# Altium PCB 100869.pcbdoc (part 3 of 3)
Units mm, origin at the board's own origin, x right, y up, seen from the top; angles counter-clockwise.
Board outline 64 x 68 mm, 4 copper layers (Top Layer, Ground, Power, Bottom Layer), stack 1.551 mm thick; 165 components, 69 nets, 488 pads, 282 vias.
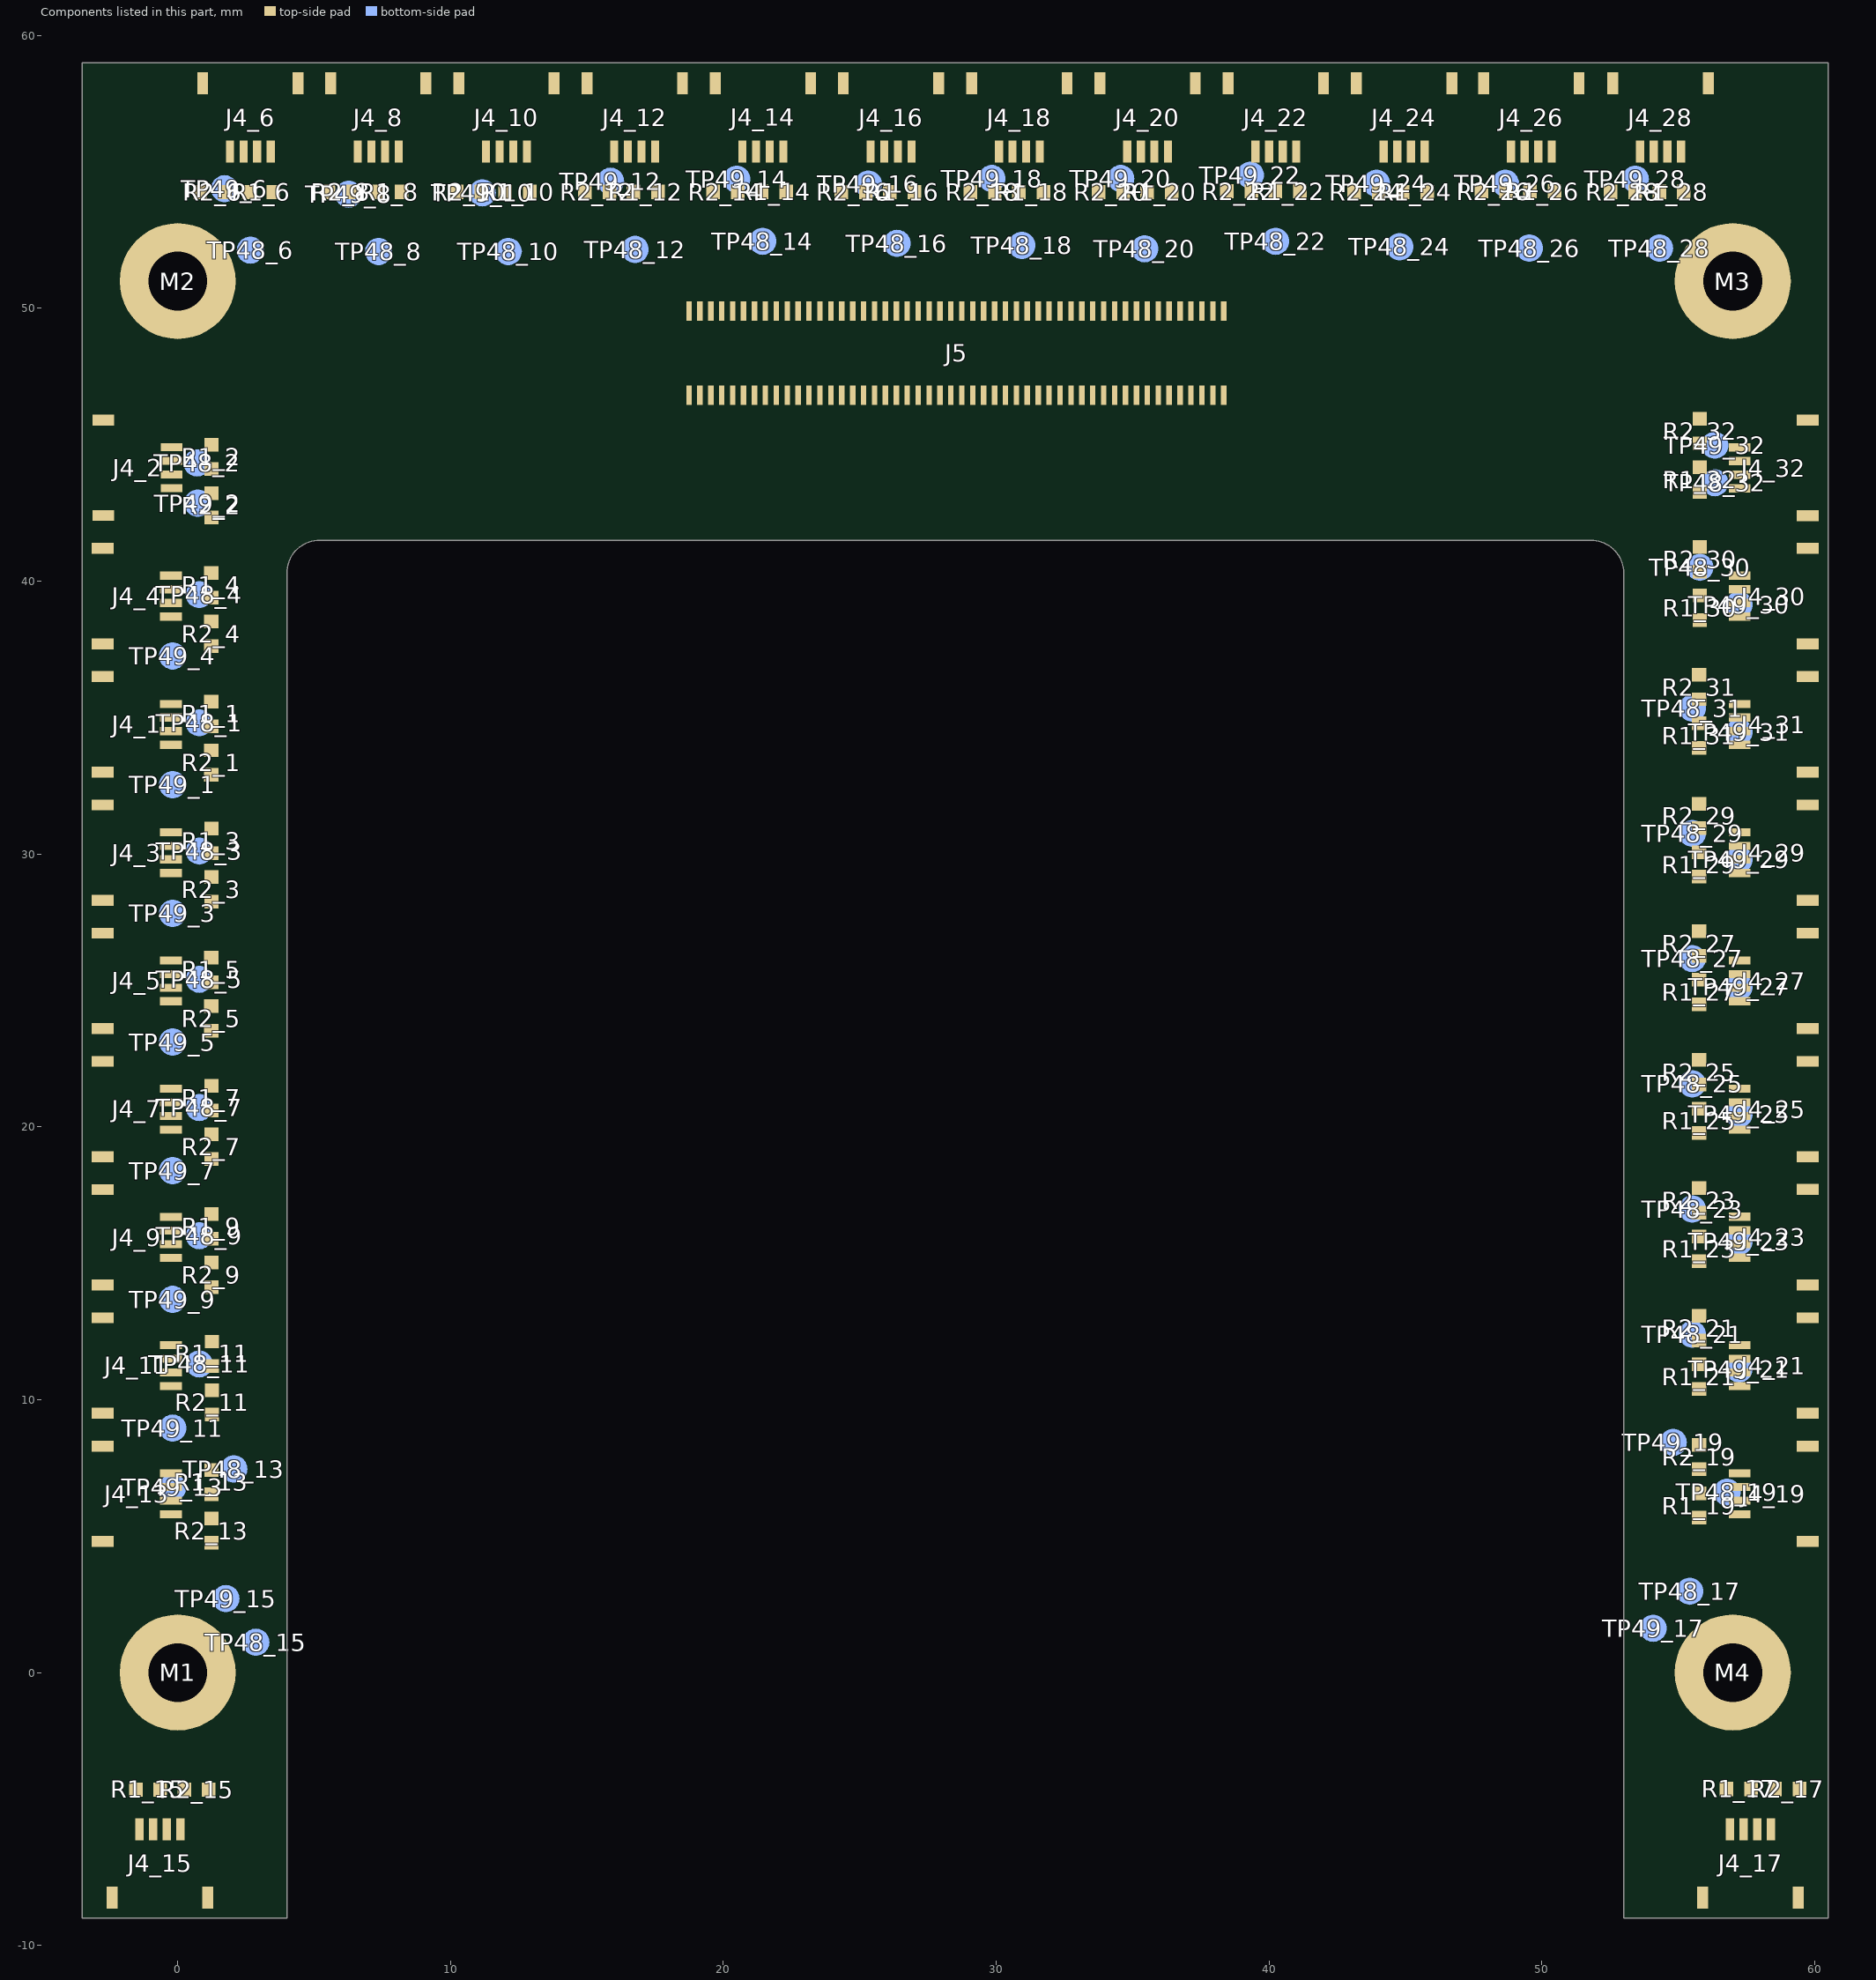
[diagram p5: the components of this part, seen from the top]

## Polygon pours and split planes (outlines as drawn)
no net on FAB_DWG (solid): -233.325,25.879 ccw(c-233.825,25.879) -233.825,26.379 ccw(c-233.825,25.879) -234.325,25.879 ccw(c-233.825,25.879) -233.825,25.379 ccw(c-233.825,25.879) -233.325,25.879
no net on FAB_DWG (solid): -235.325,25.879 ccw(c-235.825,25.879) -235.825,26.379 ccw(c-235.825,25.879) -236.325,25.879 ccw(c-235.825,25.879) -235.825,25.379 ccw(c-235.825,25.879) -235.325,25.879
no net on FAB_DWG (solid): -233.325,-24.121 ccw(c-233.825,-24.121) -233.825,-23.621 ccw(c-233.825,-24.121) -234.325,-24.121 ccw(c-233.825,-24.121) -233.825,-24.62 ccw(c-233.825,-24.121) -233.325,-24.121
no net on FAB_DWG (solid): -235.325,-24.121 ccw(c-235.825,-24.121) -235.825,-23.621 ccw(c-235.825,-24.121) -236.325,-24.121 ccw(c-235.825,-24.121) -235.825,-24.62 ccw(c-235.825,-24.121) -235.325,-24.121
no net on FAB_DWG (solid): -239.325,25.879 ccw(c-239.825,25.879) -239.825,26.379 ccw(c-239.825,25.879) -240.325,25.879 ccw(c-239.825,25.879) -239.825,25.379 ccw(c-239.825,25.879) -239.325,25.879
no net on FAB_DWG (solid): -241.325,25.879 ccw(c-241.825,25.879) -241.825,26.379 ccw(c-241.825,25.879) -242.325,25.879 ccw(c-241.825,25.879) -241.825,25.379 ccw(c-241.825,25.879) -241.325,25.879
no net on FAB_DWG (solid): -243.325,25.879 ccw(c-243.825,25.879) -243.825,26.379 ccw(c-243.825,25.879) -244.325,25.879 ccw(c-243.825,25.879) -243.825,25.379 ccw(c-243.825,25.879) -243.325,25.879
no net on FAB_DWG (solid): -237.325,25.879 ccw(c-237.825,25.879) -237.825,26.379 ccw(c-237.825,25.879) -238.325,25.879 ccw(c-237.825,25.879) -237.825,25.379 ccw(c-237.825,25.879) -237.325,25.879
no net on FAB_DWG (solid): -239.325,-24.121 ccw(c-239.825,-24.121) -239.825,-23.621 ccw(c-239.825,-24.121) -240.325,-24.121 ccw(c-239.825,-24.121) -239.825,-24.62 ccw(c-239.825,-24.121) -239.325,-24.121
no net on FAB_DWG (solid): -241.325,-24.121 ccw(c-241.825,-24.121) -241.825,-23.621 ccw(c-241.825,-24.121) -242.325,-24.121 ccw(c-241.825,-24.121) -241.825,-24.62 ccw(c-241.825,-24.121) -241.325,-24.121
no net on FAB_DWG (solid): -243.325,-24.121 ccw(c-243.825,-24.121) -243.825,-23.621 ccw(c-243.825,-24.121) -244.325,-24.121 ccw(c-243.825,-24.121) -243.825,-24.62 ccw(c-243.825,-24.121) -243.325,-24.121
no net on FAB_DWG (solid): -237.325,-24.121 ccw(c-237.825,-24.121) -237.825,-23.621 ccw(c-237.825,-24.121) -238.325,-24.121 ccw(c-237.825,-24.121) -237.825,-24.62 ccw(c-237.825,-24.121) -237.325,-24.121
no net on FAB_DWG (solid): -247.325,25.879 ccw(c-247.825,25.879) -247.825,26.379 ccw(c-247.825,25.879) -248.325,25.879 ccw(c-247.825,25.879) -247.825,25.379 ccw(c-247.825,25.879) -247.325,25.879
no net on FAB_DWG (solid): -251.325,25.879 ccw(c-251.825,25.879) -251.825,26.379 ccw(c-251.825,25.879) -252.325,25.879 ccw(c-251.825,25.879) -251.825,25.379 ccw(c-251.825,25.879) -251.325,25.879
no net on FAB_DWG (solid): -249.325,25.879 ccw(c-249.825,25.879) -249.825,26.379 ccw(c-249.825,25.879) -250.325,25.879 ccw(c-249.825,25.879) -249.825,25.379 ccw(c-249.825,25.879) -249.325,25.879
no net on FAB_DWG (solid): -245.325,25.879 ccw(c-245.825,25.879) -245.825,26.379 ccw(c-245.825,25.879) -246.325,25.879 ccw(c-245.825,25.879) -245.825,25.379 ccw(c-245.825,25.879) -245.325,25.879
no net on FAB_DWG (solid): -247.325,-24.121 ccw(c-247.825,-24.121) -247.825,-23.621 ccw(c-247.825,-24.121) -248.325,-24.121 ccw(c-247.825,-24.121) -247.825,-24.62 ccw(c-247.825,-24.121) -247.325,-24.121
no net on FAB_DWG (solid): -251.325,-24.121 ccw(c-251.825,-24.121) -251.825,-23.621 ccw(c-251.825,-24.121) -252.325,-24.121 ccw(c-251.825,-24.121) -251.825,-24.62 ccw(c-251.825,-24.121) -251.325,-24.121
no net on FAB_DWG (solid): -249.325,-24.121 ccw(c-249.825,-24.121) -249.825,-23.621 ccw(c-249.825,-24.121) -250.325,-24.121 ccw(c-249.825,-24.121) -249.825,-24.62 ccw(c-249.825,-24.121) -249.325,-24.121
no net on FAB_DWG (solid): -245.325,-24.121 ccw(c-245.825,-24.121) -245.825,-23.621 ccw(c-245.825,-24.121) -246.325,-24.121 ccw(c-245.825,-24.121) -245.825,-24.62 ccw(c-245.825,-24.121) -245.325,-24.121
no net on FAB_DWG (solid): -255.325,25.879 ccw(c-255.825,25.879) -255.825,26.379 ccw(c-255.825,25.879) -256.325,25.879 ccw(c-255.825,25.879) -255.825,25.379 ccw(c-255.825,25.879) -255.325,25.879
no net on FAB_DWG (solid): -259.325,25.879 ccw(c-259.825,25.879) -259.825,26.379 ccw(c-259.825,25.879) -260.325,25.879 ccw(c-259.825,25.879) -259.825,25.379 ccw(c-259.825,25.879) -259.325,25.879
no net on FAB_DWG (solid): -257.325,25.879 ccw(c-257.825,25.879) -257.825,26.379 ccw(c-257.825,25.879) -258.325,25.879 ccw(c-257.825,25.879) -257.825,25.379 ccw(c-257.825,25.879) -257.325,25.879
no net on FAB_DWG (solid): -253.325,25.879 ccw(c-253.825,25.879) -253.825,26.379 ccw(c-253.825,25.879) -254.325,25.879 ccw(c-253.825,25.879) -253.825,25.379 ccw(c-253.825,25.879) -253.325,25.879
no net on FAB_DWG (solid): -255.325,-24.121 ccw(c-255.825,-24.121) -255.825,-23.621 ccw(c-255.825,-24.121) -256.325,-24.121 ccw(c-255.825,-24.121) -255.825,-24.62 ccw(c-255.825,-24.121) -255.325,-24.121
no net on FAB_DWG (solid): -259.325,-24.121 ccw(c-259.825,-24.121) -259.825,-23.621 ccw(c-259.825,-24.121) -260.325,-24.121 ccw(c-259.825,-24.121) -259.825,-24.62 ccw(c-259.825,-24.121) -259.325,-24.121
no net on FAB_DWG (solid): -257.325,-24.121 ccw(c-257.825,-24.121) -257.825,-23.621 ccw(c-257.825,-24.121) -258.325,-24.121 ccw(c-257.825,-24.121) -257.825,-24.62 ccw(c-257.825,-24.121) -257.325,-24.121
no net on FAB_DWG (solid): -253.325,-24.121 ccw(c-253.825,-24.121) -253.825,-23.621 ccw(c-253.825,-24.121) -254.325,-24.121 ccw(c-253.825,-24.121) -253.825,-24.62 ccw(c-253.825,-24.121) -253.325,-24.121
no net on FAB_DWG (solid): -261.325,25.879 ccw(c-261.825,25.879) -261.825,26.379 ccw(c-261.825,25.879) -262.325,25.879 ccw(c-261.825,25.879) -261.825,25.379 ccw(c-261.825,25.879) -261.325,25.879
no net on FAB_DWG (solid): -263.825,17.879 -263.325,19.379 -232.325,19.379 -231.825,17.879 -263.825,17.879
no net on FAB_DWG (solid): -263.925,4.379 -263.425,5.88 -232.225,5.88 -231.725,4.379 -263.925,4.379
no net on FAB_DWG (solid): -231.725,-2.621 -232.225,-4.12 -263.425,-4.12 -263.925,-2.621 -231.725,-2.621
no net on FAB_DWG (solid): -231.825,-16.121 -232.325,-17.621 -263.325,-17.621 -263.825,-16.121 -231.825,-16.121
no net on FAB_DWG (solid): -261.325,-24.121 ccw(c-261.825,-24.121) -261.825,-23.621 ccw(c-261.825,-24.121) -262.325,-24.121 ccw(c-261.825,-24.121) -261.825,-24.62 ccw(c-261.825,-24.121) -261.325,-24.121
no net on FAB_DWG (solid): -318.825,26.38 -317.825,22.38 -318.825,22.879 -319.825,22.38 -318.825,26.38
no net on FAB_DWG (solid): -318.825,-24.62 -319.825,-20.62 -318.825,-21.121 -317.825,-20.62 -318.825,-24.62
no net on FAB_DWG (solid): 1029 vertices, not listed, extent 280.89,-82.333 421.936,-68.759
no net on FAB_DWG (solid): 89 vertices, not listed, extent 321.11,-72.525 327.529,-68.761
no net on FAB_DWG (solid): 74 vertices, not listed, extent 332.78,-75.496 340.172,-68.761
no net on FAB_DWG (solid): 83 vertices, not listed, extent 346.562,-74.262 351.467,-69.673
no net on FAB_DWG (solid): 82 vertices, not listed, extent 358.174,-72.906 364.519,-69.678
no net on ASY_DWG (solid): 1029 vertices, not listed, extent 280.89,-82.333 421.936,-68.759
no net on ASY_DWG (solid): 89 vertices, not listed, extent 321.11,-72.525 327.529,-68.761
no net on ASY_DWG (solid): 74 vertices, not listed, extent 332.78,-75.496 340.172,-68.761
no net on ASY_DWG (solid): 83 vertices, not listed, extent 346.562,-74.262 351.467,-69.673
no net on ASY_DWG (solid): 82 vertices, not listed, extent 358.174,-72.906 364.519,-69.678
no net on ASY_DWG_R (solid): 1029 vertices, not listed, extent -349.064,-82.333 -208.018,-68.759
no net on ASY_DWG_R (solid): 89 vertices, not listed, extent -254.657,-72.525 -248.237,-68.761
no net on ASY_DWG_R (solid): 74 vertices, not listed, extent -267.3,-75.496 -259.907,-68.761
no net on ASY_DWG_R (solid): 83 vertices, not listed, extent -278.594,-74.262 -273.689,-69.673
no net on ASY_DWG_R (solid): 82 vertices, not listed, extent -291.647,-72.906 -285.302,-69.678
no net on TITLEBLOCK (solid): 331 vertices, not listed, extent -27.089,-55.333 31.616,-48.713
no net on TITLEBLOCK (solid): -5.152,-48.933 -2.614,-51.251 -2.614,-48.933 -5.152,-48.933
no net on TITLEBLOCK (solid): -10.339,-48.933 -9.216,-50.142 -8.137,-48.933 -10.339,-48.933
no net on TITLEBLOCK (solid): 0.146,-50.833 1.136,-49.033 2.036,-50.833 0.146,-50.833
no net on TITLEBLOCK (solid): 26 vertices, not listed, extent 4.986,-50.233 7.686,-48.933
SENSOR_VCC3 on Power "SENSOR_VCC3_L03_P224" (solid, pour order 224): 27.778,40.665 27.778,60.965 63.733,60.965 63.733,-10.835 50.945,-10.835 50.945,40.665
SENSOR_VCC2 on Power "SENSOR_VCC2_L03_P222" (solid, pour order 222): 27.74,39.76 27.74,60.06 -5.26,60.06 -5.26,-11.74 7.528,-11.74 7.528,39.76
SENSOR_VCC4 on Power "SENSOR_VCC4_L03_P220" (solid, pour order 220): 32.74,48.96 32.74,52.865 48.64,52.865 48.64,59.96 61.44,59.96 61.44,17.56 56.152,17.56 56.152,43.997 51.188,48.96
SENSOR_VCC1 on Power "SENSOR_VCC1_L03_P216" (solid, pour order 216): 22.74,48.96 22.75,48.97 22.75,52.865 11.24,52.865 11.24,59.96 -3.5,59.96 -3.5,19.936 1.228,19.936 1.228,43.997 6.192,48.96
GND on Ground "GND_L02_P226" (solid, pour order 226): -7.66,61.76 -7.86,61.56 -7.86,-12.84 65.54,-12.84 65.84,-13.14 66.64,-12.34 66.64,62.06 -6.06,62.06 -6.16,61.96

## Other copper
Top Layer:
  text ".Layer_Name" at 0.372,-74.305 h3.5
Ground:
  text ".Layer_Name" at 3.44,-74.54 h3.5
Power:
  text ".Layer_Name" at 5.24,-74.54 h3.5
Bottom Layer:
  text "601-'.Board_Number'-R'.PCB_Revision'" at 46.33,41.95 h1.2
  text ".Layer_Name" at -5.043,-73.971 h3.5

## Silkscreen, mask and mechanical layers (free items; w line width, h text height)
Top Overlay:
  region: 10.3,46.4 14.3,46.4 14.3,42.4 10.3,42.4
  lines w0.15: 15.039,42.26 15.039,48.76 ; 15.039,48.885 cw(c17.039,48.885) 17.039,50.885 39.625,50.885 cw(c39.625,49.885) 40.332,50.592 41.747,49.178 cw(c41.039,48.471) 42.039,48.471 ; 42.04,42.26 42.04,48.46
  text "#13" at 20.2,52 h1
  text "#15" at 25.1,51.9 h1
  text "#17" at 29.7,51.9 h1
  text "#19" at 34.4,51.9 h1
  text "#21" at 39.3,51.9 h1
  text "#23" at 43.8,51.9 h1
  text "#25" at 48.3,51.9 h1
  text "#11" at 15.7,51.8 h1
  text "#5" at 2.4,51.6 h1
  text "#7" at 6.4,51.6 h1
  text "#9" at 11,51.6 h1
  text "#27" at 51.9,51.6 h1
  text "'.Board_Name'" at 2.5,49.8 h1
  text "601-'.Board_Number'" at 5.5,47.9 h1
  text "REV" at 7.2,43.81 h1
  text "#31" at 54.3,43.3 h1 r90
  text "#1" at 3.7,43.2 h1 r90
  text "#3" at 3.4,38.4 h1 r90
  text "#29" at 54.4,38.2 h1 r90
  text "#0" at 3.5,33.9 h1 r90
  text "#30" at 54.5,33.2 h1 r90
  text "#2" at 3.4,29 h1 r90
  text "#28" at 54.5,28.8 h1 r90
  text "#4" at 3.5,24.4 h1 r90
  text "#26" at 54.5,24.1 h1 r90
  text "#6" at 3.5,19.7 h1 r90
  text "#24" at 54.5,19.3 h1 r90
  text "#8" at 3.6,14.9 h1 r90
  text "#22" at 54.5,14.4 h1 r90
  text "#10" at 3.6,10 h1 r90
  text "#20" at 54.5,9.9 h1 r90
  text "#18" at 54.5,5.1 h1 r90
  text "#12" at 3.6,4.9 h1 r90
  text "#16" at 54.8,-8.1 h1 r90
  text "#14" at 3.1,-8.2 h1 r90
  text ".Layer_Name" at -0.36,-74.64 h3.5
Bottom Overlay:
  lines w0.1: 19.1,43.3 19.1,49.3 36.1,49.3 36.1,43.3 19.1,43.3
  text ".Layer_Name" at -4.96,-74.64 h3.5
Top Paste:
  text ".Layer_Name" at -0.703,-73.971 h3.5
Bottom Paste:
  text ".Layer_Name" at -5.193,-74.555 h3.5
Top Solder:
  text ".Layer_Name" at -1.377,-73.971 h3.5
Bottom Solder:
  text ".Layer_Name" at -5.868,-74.555 h3.5
Drill Guide:
  text ".Layer_Name" at -0.153,-74.638 h3.5
Outline:
  the board outline again, w0.013
FAB_DWG:
  drawing of 241 lines, arcs and shapes, not listed
  text "1" at 364.772,375.655 h7.62
  text "6" at -186.56,375.477 h7.62
  text "5" at -75.968,375.401 h7.62
  text "7" at -296.491,375.35 h7.62
  text "4" at 33.633,375.249 h7.62
  text "3" at 144.402,375.249 h7.62
  text "2" at 254.435,375.249 h7.62
  text "REVISIONS" at 318.792,366.667 h2.54
  text "NOTES: UNLESS OTHERWISE SPECIFIED" at -337.668,360.205 h2.03
  text "REV" at 236.5,359.667 h2.03
  text "DESCRIPTION" at 291.004,359.667 h2.03
  text "DATE" at 382.688,359.667 h2.03
  text "APRVD" at 407.876,359.667 h2.03
  text "1   DIMENSIONS AND VALUES ARE METRIC." at -337.668,352.205 h2.03
  text "01" at 236.904,351.667 h2.54
  text "INITIAL RELEASE" at 247.936,351.667 h2.54
  text "08/10/2016" at 376.776,351.667 h2.54
  text "2   FABRICATION OF PRINTED CIRCUIT BOARD SHALL BE IN ACCORDANCE WITH" at -337.668,346.205 h2.03
  text "02" at 236.704,344.767 h2.54
  text "ALPHA 2 RELEASE" at 247.736,344.767 h2.54
  text "09/19/2016" at 376.576,344.767 h2.54
  text "IPC-6011 AND IPC-6012, CLASS 2, AND THE DESIGN INTENT OF IPC-2221 AND" at -337.668,342.205 h2.03
  text "IPC-2222,CLASS 2, AND SHALL MEET THE ACCEPTABILITY REQUIREMENTS OF" at -337.668,338.205 h2.03
  text "IPC-A-600. PRODUCE PCB USING GERBER OR ODB++ FILES PROVIDED." at -337.668,334.205 h2.03
  text "3   FABRICATION VENDOR MUST BE UL APPROVED AND BOARD SHALL BE MARKED WITH" at -337.668,328.205 h2.03
  text "A UL REGISTERED LOGO. MATERIAL MUST MEET UL 94V-0 FLAMMABILITY RATING." at -337.668,324.205 h2.03
  text "4   MATERIAL REQUIREMENTS: MANUFACTURER SHALL SELECT MATERIALS TO ACHIEVE A" at -337.668,318.205 h2.03
  text "BALANCED CONSTRUCTION WITH THE OPTION OF MODIFYING DIELECTRIC THICKNESS" at -337.668,314.205 h2.03
  text "TO MEET THE REQUIREMENTS SPECIFIED HEREIN." at -337.668,310.205 h2.03
  text "D" at 426.621,305.983 h7.62
  text "D" at -358.061,305.831 h7.62
  text "5  BASE MATERIALS: GLASS EPOXY FR4 OR EQUIVALENT PER IPC-4101 MEETING RoHS" at -337.668,304.205 h2.03
  text "REQUIREMENTS FOR PCB FABRICATION AND ASSEMBLY, NOT LESS THAN TG150," at -337.668,300.205 h2.03
  text "A  SEE LAYER DETAIL FOR LAYER STACK UP, ESTIMATED DIELECTRIC THICKNESS," at -337.668,296.205 h2.03
  text "AND COPPER WEIGHT." at -337.668,292.205 h2.03
  text "B  MANUFACTURER SHALL SUBMIT A PROPOSED STACK UP FOR SYNAPSE APPROVAL" at -337.668,288.205 h2.03
  text "IF MODIFICATION IS REQUIRED." at -337.668,284.205 h2.03
  text "C  NO MATERIAL SUBSTITUTIONS WILL BE ALLOWED WITHOUT SYNAPSE APPROVAL." at -337.668,280.205 h2.03
  text "6   PROCESSING ALLOWANCE:" at -337.668,274.205 h2.03
  text "A  LAYER REGISTRATION FROM PRIMARY SIDE TO SECONDARY SIDE SHALL NOT" at -337.668,270.205 h2.03
  text "EXCEED 0.13mm TOTAL." at -337.668,266.205 h2.03
  text "B  MAXIMUM BOW AND TWIST SHALL BE .75% PER IPC-TM-650." at -337.668,262.205 h2.03
  text "7   VIAS" at -337.668,256.205 h2.03
  text "A  VIAS WITH A FINISHED HOLE SIZE OF 0.25mm OR SMALLER DO NOT REQUIRE" at -337.668,252.205 h2.03
  text "A MINIMUM HOLE SIZE AND MAY BE PLATED SHUT OR FILLED WITH SOLDER" at -337.668,248.205 h2.03
  text "MASK. MINIMUM SOLDER PLATING MUST BE MAINTAINED." at -337.668,244.205 h2.03
  text "B  ALL LASER VIA IN PADS TO BE COPLANAR IF PRESENT IN DESIGN." at -337.668,240.205 h2.03
  text "8   CONDUCTORS:  COPPER FOIL SHALL BE IN ACCORDANCE WITH IPC-4562/0." at -337.668,234.205 h2.03
  text "A  FINISH. COPPER PLATE THICKNESS ON SURFACE COPPER AND PLATED" at -337.668,230.205 h2.03
  text "THROUGH HOLES TO BE 0.025mm MINIMUM." at -337.668,226.205 h2.03
  text "B  MINIMUM FINISH CONDUCTOR WIDTH IS 0.076mm" at -337.668,222.205 h2.03
  text "C  MINIMUM FINISHED CONDUCTOR SPACING (AIR GAP) INCLUDING PADS, VIAS," at -337.668,218.205 h2.03
  text "SHAPES, ETC. IS 0.076mm." at -337.668,214.205 h2.03
  text "9   FINAL FINISH SHALL BE ELECTROLESS NICKEL / IMMERSION GOLD (ENIG)." at -337.668,208.205 h2.03
  text "FINISH THICKNESS SHALL BE 3 TO 6 um [118 TO 236 MICROINCHES] OF NICKEL" at -337.668,204.205 h2.03
  text "AND 0.04 TO 0.125um [1.5 TO 5 MICROINCHES] OF GOLD." at -337.668,200.205 h2.03
  text "FINISH SHALL BE RoHS COMPLIANT AND MEET REQUIREMENTS OF IPC-4552." at -337.668,196.205 h2.03
  text "10  FILLETING IS NOT PERMITTED WITHOUT PRIOR SYNAPSE APPROVAL." at -337.668,190.205 h2.03
  text "11  SOLDER MASK AND COATING:  APPLY SOLDER MASK TO PRIMARY AND SECONDARY" at -337.668,184.205 h2.03
  text "C" at 426.621,180.532 h7.62
  text "C" at -358.188,180.329 h7.62
  text "SIDES OF PRINTED WIRING BOARD USING SUPPLIED GERBER FILES IN ACCORDANCE" at -337.668,180.205 h2.03
  text "WITH IPC-SM-840, THICKNESS BETWEEN 0.02 - 0.04mm, COLOR GREEN LIQUID" at -337.668,176.205 h2.03
  text "PHOTO-IMAGEABLE, CLASS 2." at -337.668,172.205 h2.03
  text "12  OVERALL BOARD THICKNESS SHALL BE MEASURED OVER FINAL FINISH INCLUDING" at -337.668,166.205 h2.03
  text "SOLDER MASK." at -337.668,162.205 h2.03
  text "13  SILKSCREEN:  APPLY SILKSCREEN (LEGEND) TO PRIMARY AND SECONDARY SIDES" at -337.668,156.205 h2.03
  text "OF PRINTED CIRCUIT BOARD. USE PERMANENT INK, NON-NUTRIENT, NON-" at -337.668,152.205 h2.03
  text "CONDUCTIVE POLYMER, COLOR WHITE, PER IPC-4781, TYPE 2. RELIEVE LEGEND" at -337.668,148.205 h2.03
  text "FROM ALL EXPOSED LANDS AND HOLES AS REQUIRED." at -337.668,144.205 h2.03
  text "14  ANY ALTERATIONS TO THE PROVIDED GERBER ARTWORK FILES MUST BE SUBMITTED" at -337.668,139.205 h2.03
  text "TO SYNAPSE FOR APPROVAL." at -337.668,135.205 h2.03
  text "15  MARK MANUFACTURER NAME, INITIALS, OR LOGO, LOT NUMBER, DATE CODE," at -337.668,129.425 h2.03
  text "UL RECOGNITION MARK AND FLAME RATING IN ETCH OR SILKSCREEN." at -337.668,125.425 h2.03
  text "16  PANELIZATION: COORDINATE WITH SYNAPSE OR THE SYNAPSE SPECIFIED" at -337.668,119.675 h2.03
  text "ASSEMBLY VENDOR FOR PANEL SIZE AND CONFIGURATION. IF BOARDS ARE" at -337.668,115.675 h2.03
  text "NOT TO BE COMPLETELY ROUTED OUT, TRIM PANELIZATION TABS TO LESS" at -337.668,111.675 h2.03
  text "THAN 0.1mm UPON DE-PANELIZATION. AVOID PANELIZATION TABS IN AREAS" at -337.668,107.675 h2.03
  text "INDICATED ON THIS DRAWING." at -337.668,103.675 h2.03
  text "17  BOARD MUST BE ELECTRICALLY TESTED USING SUPPLIED IPC-356 NETLIST." at -338,99 h2.03
  text "18 ROUTING OF BOARD'S INSIDE CORNERS TO BE 1.2MM RADIUS, MAXIMUM." at -338,94 h2.03
  text "B" at -357.959,54.929 h7.62
  text "B" at 429.698,52.632 h7.62
  text "PRIMARY SIDE" at -257.569,34.879 h2.03
  text "SILKSCREEN" at -228.325,29.88 h2.03
  text "SOLDERMASK" at -228.325,24.379 h2.03
  text "1 OZ CU" at -281.96,17.46 h2.03
  text "LAYER 1 (SIGNAL)" at -228.325,17.379 h2.03
  text "DIELECTRIC" at -283.565,11.879 h2.03
  text "1.50 +/-0.15" at -328.569,5.379 h2.03
  text "1/2 OZ CU" at -282.06,4.26 h2.03
  text "LAYER 2 (GROUND)" at -228.325,3.88 h2.03
  text "FINISHED" at -325.321,0.379 h2.03
  text "DIELECTRIC" at -283.565,-0.12 h2.03
  text "THICKNESS" at -326.633,-4.621 h2.03
  text "LAYER 3 (POWER)" at -228.325,-4.621 h2.03
  text "1/2 OZ CU" at -282.06,-4.74 h2.03
  text "DIELECTRIC" at -283.565,-12.621 h2.03
  text "1 OZ CU" at -281.96,-17.84 h2.03
  text "LAYER 4 (SIGNAL)" at -228.325,-18.121 h2.03
  text "SOLDERMASK" at -228.325,-25.121 h2.03
  text "SILKSCREEN" at -228.325,-31.121 h2.03
  text "DIMENSIONS ARE FOR REFERENCE ONLY," at 3.536,-33.363 h2.29
  text "SECONDARY SIDE" at -259.193,-35.621 h2.03
  text "USE BOARD OUTLINE FOR DIMENSIONAL DATA." at -2.524,-37.953 h2.29
  text "LAYER DETAIL" at -272.209,-48.616 h5.08
  text "SCALE:NONE" at -257.445,-55.62 h2.03
  text "CAP CONSTRUCTION SHOWN (PREFERRED)" at -274.933,-63.816 h2.03
  text "CORE CONSTRUCTION ACCEPTABLE" at -270.061,-68.62 h2.03
  text "A" at 426.494,-70.826 h7.62
  text "A" at -358.213,-70.953 h7.62
  text "APPROVALS" at 218.628,-74.333 h2.03
  text "DATE" at 261.688,-74.333 h2.03
  text "UNLESS OTHERWISE" at 162.68,-76.333 h2.54
  text "DESIGNER" at 201.936,-80.333 h2.03
  text "SPECIFIED" at 169.792,-81.333 h2.54
  text "DIMENSIONS ARE" at 164.712,-86.333 h2.54
  text "F. PRICE" at 205.936,-86.333 h2.54
  text "09/19/2016" at 255.776,-86.333 h2.54
  text "1511 Sixth Ave. Suite 300, Seattle, WA 98101 206.381.0898" at 293.024,-87.333 h2.54
  text "IN MILLIMETERS" at 164.712,-91.333 h2.54
  text "ENGINEER" at 201.936,-93.333 h2.03
  text "PRINTED CIRCUIT BOARD" at 319.432,-95.833 h3.81
  text "PROPRIETARY" at 114.172,-96.333 h3.81
  text "D. BRUEY /  M. CIUFFO" at 205.936,-99.333 h2.54
  text "TOLERANCES:" at 168.76,-101.333 h2.54
  text "AND" at 126.364,-102.333 h3.81
  text ".Board_Name" at 328.755,-103.513 h5.08
  text "MECH ENG" at 201.936,-106.333 h2.03
  text ".XX" at 167.44,-108.333 h2.29
  text "0.25" at 180.936,-108.333 h2.29
  text "CONFIDENTIAL" at 112.648,-108.833 h3.81
  text "SIZE" at 285.088,-110.333 h1.78
  text "DWG NO" at 295.936,-110.333 h1.78
  text "REV" at 403.8,-110.333 h1.78
  text "DAHLGREN/ DONAGHY" at 205.936,-112.333 h2.54
  text "THE INFORMATION CONTAINED IN" at 114.662,-113.083 h1.52
  text ".XXX" at 165.608,-115.333 h2.29
  text "0.127" at 180.936,-115.333 h2.29
  text "THIS DRAWING IS PROPRIETARY AND" at 112.838,-115.833 h1.52
  text "RESTRICTED. ANY REPRODUCTION" at 114.662,-118.583 h1.52
  text "601-" at 312.991,-120.034 h7.62
  text ".Board_Number" at 341.391,-120.134 h7.62
  text "D" at 284.888,-120.333 h7.62
  text ".PCB_Revision" at 399.332,-120.841 h7.62
  text "IN PART OR WHOLE WITHOUT THE" at 114.662,-121.333 h1.52
  text "ANGLES" at 167.944,-122.333 h2.29
  text "5" at 186.936,-122.333 h2.29
  text "EXPRESS WRITTEN PERMISSION" at 115.628,-124.083 h1.52
  text "OF THE OWNER IS PROHIBITED" at 115.628,-126.833 h1.52
  text "SCALE:NONE" at 285.816,-127.333 h1.78
  text "SHEET 1 OF 1" at 397.392,-127.333 h1.78
  text "1" at 364.976,-139.381 h7.62
  text "6" at -186.484,-139.533 h7.62
  text "5" at -76.045,-139.533 h7.62
  text "4" at 33.404,-139.812 h7.62
  text "3" at 144.224,-139.838 h7.62
  text "2" at 254.663,-139.838 h7.62
  text "7" at -296.593,-140.397 h7.62
ASY_DWG:
  circle w0.38: c190.679,-119.785 r0.829
  lines w0.3: 200.936,-129.333 200.936,-69.333 ; 200.936,-115.333 280.936,-115.333 ; 200.936,-102.333 280.936,-102.333 ; 200.936,-89.333 280.936,-89.333 421.936,-89.333 ; 200.936,-76.333 280.936,-76.333 ; 231.936,342.667 421.936,342.667 ; 232.261,349.759 231.936,349.667 421.936,349.667 ; 232.261,364.759 231.936,364.667 421.936,364.667 ; 245.936,335.667 245.936,364.667 ; 250.936,-129.333 250.936,-69.333 ; 280.936,-129.333 280.936,-69.333 ; 280.936,-123.333 421.936,-123.333 ; 280.936,-107.333 420.936,-107.333 ; 293.936,-123.333 293.936,-107.333 ; 370.936,335.667 370.936,364.667 ; 389.936,-123.333 389.936,-107.333 ; 401.936,335.667 401.936,364.667
  lines w0.38: 175.936,-115.333 177.936,-115.333 ; 175.936,-113.333 177.936,-113.333 ; 175.936,-108.333 177.936,-108.333 ; 175.936,-106.333 177.936,-106.333 ; 176.936,-114.333 176.936,-112.333 ; 176.936,-107.333 176.936,-105.333 ; 181.936,-122.333 183.936,-122.333 ; 181.936,-120.333 183.936,-120.333 ; 182.936,-121.333 182.936,-119.333
  lines w0.508: 201.958,371.871 201.958,384.825 ; 201.958,371.871 201.958,384.825 ; 201.958,371.871 201.958,384.825 ; -368.653,-4.684 -349.349,-4.684 -368.653,-4.684 ; -368.653,-4.227 -349.349,-4.227 -368.653,-4.227 ; -368.653,120.715 -349.349,120.715 -368.653,120.715 ; -368.653,121.173 -349.349,121.173 -368.653,121.173 ; -368.653,246.115 -349.349,246.115 -368.653,246.115 ; -368.653,246.572 -349.349,246.572 -368.653,246.572 ; -239.417,-142.784 -239.417,-129.83 -239.417,-142.784 ; -239.417,371.871 -239.417,384.825 -239.417,371.871 ; -238.96,-142.784 -238.96,-129.83 -238.96,-142.784 ; -238.96,371.871 -238.96,384.825 -238.96,371.871 ; -129.207,-142.784 -129.207,-129.83 -129.207,-142.784 ; -129.207,371.871 -129.207,384.825 -129.207,371.871 ; -128.75,-142.784 -128.75,-129.83 -128.75,-142.784 ; -128.75,371.871 -128.75,384.825 -128.75,371.871 ; -18.971,-142.784 -18.971,-129.83 -18.971,-142.784 ; -18.971,371.871 -18.971,384.825 -18.971,371.871 ; -18.514,-142.784 -18.514,-129.83 -18.514,-142.784 ; -18.514,371.871 -18.514,384.825 -18.514,371.871 ; 91.291,371.871 91.291,384.825 91.291,371.871 ; 91.748,371.871 91.748,384.825 91.748,371.871 ; 201.501,371.871 201.501,384.825 201.501,371.871 ; 311.712,372.125 311.712,384.825 311.712,372.125 ; 311.737,-142.784 311.737,-129.83 311.737,-142.784 ; 312.169,371.871 312.169,384.825 312.169,371.871 ; 312.194,-142.784 312.194,-129.83 312.194,-142.784 ; 422.176,-4.684 441.48,-4.684 422.176,-4.684 ; 422.176,-4.227 441.48,-4.227 422.176,-4.227 ; 422.176,120.741 441.48,120.741 422.176,120.741 ; 422.176,121.198 441.48,121.198 422.176,121.198 ; 422.176,246.166 441.48,246.166 422.176,246.166 ; 422.176,246.623 441.48,246.623 422.176,246.623
  lines w1: -349.064,-129.333 421.936,-129.333 421.936,371.667 -349.064,371.667 -349.064,-129.333
  lines w1.1: 91.936,-142.333 91.936,-129.333 ; 105.936,-129.333 105.936,-89.333 156.936,-89.333 ; 156.936,-129.333 156.936,-89.333 ; 200.936,-142.333 200.936,-129.333 ; 231.936,335.667 231.936,371.667 ; 231.936,356.667 421.936,356.667 ; 280.936,-69.333 156.936,-69.333 156.936,-89.333
  text "1" at 364.772,375.655 h7.62
  text "6" at -186.56,375.477 h7.62
  text "5" at -75.968,375.401 h7.62
  text "7" at -296.491,375.35 h7.62
  text "4" at 33.633,375.249 h7.62
  text "3" at 144.402,375.249 h7.62
  text "2" at 254.435,375.249 h7.62
  text "REVISIONS" at 318.792,366.667 h2.54
  text "REV" at 236.5,359.667 h2.03
  text "DESCRIPTION" at 291.004,359.667 h2.03
  text "DATE" at 382.688,359.667 h2.03
  text "APRVD" at 407.876,359.667 h2.03
  text "NOTES: UNLESS OTHERWISE SPECIFIED" at -336.939,359.567 h2.03
  text "1   RoHS COMPLIANT ASSEMBLY REQUIRED. ASSEMBLE PER IPC-A-610, CLASS 2," at -336.839,353.067 h2.03
  text "01" at 236.904,351.667 h2.54
  text "INITIAL RELEASE" at 247.936,351.667 h2.54
  text "08/10/2016" at 376.776,351.667 h2.54
  text "2   AQUEOUS BASED CLEANING AFTER SOLDER FOR ALL COMPONENTS IS PREFERRED, NO-CLEAN" at -336.745,347.862 h2.03
  text "02" at 236.704,344.767 h2.54
  text "ALPHA 2 RELEASE" at 247.736,344.767 h2.54
  text "09/19/2016" at 376.576,344.767 h2.54
  text "RoHS SOLDER PROCESS IS ACCEPTABLE." at -336.889,343.717 h2.03
  text "3   ITEM IDENTIFICATION: MARK REVISION NUMBER OF THIS DRAWING IN THE SPACE PROVIDED." at -337.064,337.917 h2.03
  text "D" at 426.621,305.983 h7.62
  text "D" at -358.061,305.831 h7.62
  text "C" at 426.621,180.532 h7.62
  text "C" at -358.188,180.329 h7.62
  text "B" at -357.959,54.929 h7.62
  text "B" at 429.698,52.632 h7.62
  text "ASSEMBLY TOP" at 14.62,-29.308 h3.81
  text "A" at 426.494,-70.826 h7.62
  text "A" at -358.213,-70.953 h7.62
  text "APPROVALS" at 218.628,-74.333 h2.03
  text "DATE" at 261.688,-74.333 h2.03
  text "UNLESS OTHERWISE" at 162.68,-76.333 h2.54
  text "DESIGNER" at 201.936,-80.333 h2.03
  text "SPECIFIED" at 169.792,-81.333 h2.54
  text "DIMENSIONS ARE" at 164.712,-86.333 h2.54
  text "F. PRICE" at 205.936,-86.333 h2.54
  text "09/19/2016" at 255.776,-86.333 h2.54
  text "1511 Sixth Ave. Suite 300, Seattle, WA 98101 206.381.0898" at 293.024,-87.333 h2.54
  text "IN MILLIMETERS" at 164.712,-91.333 h2.54
  text "ENGINEER" at 201.936,-93.333 h2.03
  text "PRINTED CIRCUIT BOARD ASSEMBLY" at 305.716,-95.833 h3.81
  text "PROPRIETARY" at 114.172,-96.333 h3.81
  text "D. BRUEY /  M. CIUFFO" at 205.936,-99.333 h2.54
  text "TOLERANCES:" at 168.76,-101.333 h2.54
  text "AND" at 126.364,-102.333 h3.81
  text ".Board_Name" at 328.744,-103.471 h5.08
  text "MECH ENG" at 201.936,-106.333 h2.03
  text ".XX" at 167.44,-108.333 h2.29
  text "0.25" at 180.936,-108.333 h2.29
  text "CONFIDENTIAL" at 112.648,-108.833 h3.81
  text "SIZE" at 285.088,-110.333 h1.78
  text "DWG NO" at 295.936,-110.333 h1.78
  text "REV" at 403.8,-110.333 h1.78
  text "DAHLGREN/ DONAGHY" at 205.936,-112.333 h2.54
  text "THE INFORMATION CONTAINED IN" at 114.662,-113.083 h1.52
  text ".XXX" at 165.608,-115.333 h2.29
  text "0.127" at 180.936,-115.333 h2.29
  text "THIS DRAWING IS PROPRIETARY AND" at 112.838,-115.833 h1.52
  text "RESTRICTED. ANY REPRODUCTION" at 114.662,-118.583 h1.52
  text "600-" at 311.691,-120.034 h7.62
  text ".Board_Number" at 341.391,-120.134 h7.62
  text "D" at 284.888,-120.333 h7.62
  text ".PCB_Revision" at 399.332,-120.841 h7.62
  text "IN PART OR WHOLE WITHOUT THE" at 114.662,-121.333 h1.52
  text "ANGLES" at 167.944,-122.333 h2.29
  text "5" at 186.936,-122.333 h2.29
  text "EXPRESS WRITTEN PERMISSION" at 115.628,-124.083 h1.52
  text "OF THE OWNER IS PROHIBITED" at 115.628,-126.833 h1.52
  text "SCALE:4:1" at 286.528,-127.333 h1.78
  text "SHEET 1 OF 2" at 397.392,-127.333 h1.78
  text "1" at 364.976,-139.381 h7.62
  text "6" at -186.484,-139.533 h7.62
  text "5" at -76.045,-139.533 h7.62
  text "4" at 33.404,-139.812 h7.62
  text "3" at 144.224,-139.838 h7.62
  text "2" at 254.663,-139.838 h7.62
  text "7" at -296.593,-140.397 h7.62
ASY_DWG_R:
  lines w0.3: -349.064,-123.333 -208.064,-123.333 ; -349.064,-89.333 -208.064,-89.333 ; -348.064,-107.333 -208.064,-107.333 ; -317.064,-123.333 -317.064,-107.333 ; -221.064,-123.333 -221.064,-107.333 ; -208.064,-129.333 -208.064,-69.333
  lines w0.508: -129.086,371.871 -129.086,384.825 ; -129.086,371.871 -129.086,384.825 ; -129.086,371.871 -129.086,384.825 ; -368.608,-4.684 -349.304,-4.684 -368.608,-4.684 ; -368.608,-4.227 -349.304,-4.227 -368.608,-4.227 ; -368.608,120.741 -349.304,120.741 -368.608,120.741 ; -368.608,121.198 -349.304,121.198 -368.608,121.198 ; -368.608,246.166 -349.304,246.166 -368.608,246.166 ; -368.608,246.623 -349.304,246.623 -368.608,246.623 ; -239.322,-142.784 -239.322,-129.83 -239.322,-142.784 ; -239.297,371.871 -239.297,384.825 -239.297,371.871 ; -238.865,-142.784 -238.865,-129.83 -238.865,-142.784 ; -238.84,372.125 -238.84,384.825 -238.84,372.125 ; -128.629,371.871 -128.629,384.825 -128.629,371.871 ; -18.876,371.871 -18.876,384.825 -18.876,371.871 ; -18.419,371.871 -18.419,384.825 -18.419,371.871 ; 91.386,-142.784 91.386,-129.83 91.386,-142.784 ; 91.386,371.871 91.386,384.825 91.386,371.871 ; 91.843,-142.784 91.843,-129.83 91.843,-142.784 ; 91.843,371.871 91.843,384.825 91.843,371.871 ; 201.622,-142.784 201.622,-129.83 201.622,-142.784 ; 201.622,371.871 201.622,384.825 201.622,371.871 ; 202.079,-142.784 202.079,-129.83 202.079,-142.784 ; 202.079,371.871 202.079,384.825 202.079,371.871 ; 311.832,-142.784 311.832,-129.83 311.832,-142.784 ; 311.832,371.871 311.832,384.825 311.832,371.871 ; 312.289,-142.784 312.289,-129.83 312.289,-142.784 ; 312.289,371.871 312.289,384.825 312.289,371.871 ; 422.221,-4.684 441.525,-4.684 422.221,-4.684 ; 422.221,-4.227 441.525,-4.227 422.221,-4.227 ; 422.221,120.715 441.525,120.715 422.221,120.715 ; 422.221,121.173 441.525,121.173 422.221,121.173 ; 422.221,246.115 441.525,246.115 422.221,246.115 ; 422.221,246.572 441.525,246.572 422.221,246.572
  lines w1: -349.064,-129.333 421.936,-129.333 421.936,371.667 -349.064,371.667 -349.064,-129.333
  lines w1.1: -128.064,-142.333 -128.064,-129.333 ; -19.064,-142.333 -19.064,-129.333
  text "1" at -291.9,375.655 h7.62
  text "6" at 259.432,375.477 h7.62
  text "5" at 148.84,375.401 h7.62
  text "7" at 369.363,375.35 h7.62
  text "2" at -181.563,375.249 h7.62
  text "3" at -71.53,375.249 h7.62
  text "4" at 39.239,375.249 h7.62
  text "NOTES: UNLESS OTHERWISE SPECIFIED" at 409.811,359.567 h2.03
  text "1   RoHS COMPLIANT ASSEMBLY REQUIRED. ASSEMBLE PER IPC-A-610, CLASS 2," at 409.711,353.067 h2.03
  text "2   AQUEOUS BASED CLEANING AFTER SOLDER FOR ALL COMPONENTS IS PREFERRED, NO-CLEAN" at 409.617,347.862 h2.03
  text "RoHS SOLDER PROCESS IS ACCEPTABLE." at 409.761,343.717 h2.03
  text "3   ITEM IDENTIFICATION: MARK REVISION NUMBER OF THIS DRAWING IN THE SPACE PROVIDED." at 409.936,337.917 h2.03
  text "D" at -353.749,305.983 h7.62
  text "D" at 430.933,305.831 h7.62
  text "C" at -353.749,180.532 h7.62
  text "C" at 431.06,180.329 h7.62
  text "B" at -353.876,54.929 h7.62
  text "B" at 433.781,52.632 h7.62
  text "ASSEMBLY BOTTOM" at 59.62,-29.308 h3.81
  text "A" at -353.622,-70.826 h7.62
  text "A" at 431.085,-70.953 h7.62
  text "1511 Sixth Ave. Suite 300, Seattle, WA 98101 206.381.0898" at -220.152,-87.333 h2.54
  text "PRINTED CIRCUIT BOARD ASSEMBLY" at -232.844,-95.833 h3.81
  text ".Board_Name" at -258.607,-103.848 h5.08
  text "REV" at -330.928,-110.333 h1.78
  text "DWG NO" at -223.064,-110.333 h1.78
  text "SIZE" at -212.216,-110.333 h1.78
  text "600-" at -238.819,-120.034 h7.62
  text ".Board_Number" at -268.519,-120.134 h7.62
  text "D" at -212.016,-120.333 h7.62
  text ".PCB_Revision" at -327.353,-120.855 h7.62
  text "SHEET 2 OF 2" at -324.52,-127.333 h1.78
  text "SCALE:4:1" at -213.656,-127.333 h1.78
  text "1" at -292.104,-139.381 h7.62
  text "5" at 148.917,-139.533 h7.62
  text "6" at 259.356,-139.533 h7.62
  text "4" at 39.468,-139.812 h7.62
  text "2" at -181.791,-139.838 h7.62
  text "3" at -71.352,-139.838 h7.62
  text "7" at 369.465,-140.397 h7.62
TITLEBLOCK:
  lines w0.25: -26.964,-67.833 94.036,-67.833 ; 31.536,-48.833 94.036,-48.833 94.036,-77.333 -26.964,-77.333 -26.964,-55.333 94.036,-55.333 ; 49.536,-77.333 49.536,-48.833 ; 49.536,-60.333 94.036,-60.333 ; 83.036,-67.833 83.036,-60.333
  text "PRODUCT" at 35.78,-51.333 h1.52
  text "1511 SIXTH AVENUE, THIRD FLOOR" at 50.536,-51.333 h1.52
  text "DEVELOPMENT" at 33.848,-54.333 h1.52
  text "SEATTLE,WA 98101  206.381.0898" at 50.536,-54.333 h1.52
  text "DATE" at 50.536,-57.333 h1.02
  text "09/19/2016" at 63.416,-58.833 h2.03
  text "PRINTED CIRCUIT BOARD" at -8.2,-59.833 h2.29
  text "PART NUMBER" at 50.536,-62.333 h1.02
  text "REV" at 87.312,-62.333 h1.02
  text ".Board_Name" at -5.554,-65.784 h3.81
  text "601-" at 56.191,-66.034 h2.54
  text ".Board_Number" at 66.491,-66.034 h2.54
  text ".PCB_Revision" at 86.336,-66.501 h2.54
  text "PROPRIETARY AND CONFIDENTIAL" at 54.762,-70.833 h1.52
  text "THE INFORMATION CONTAINED IN THIS DRAWING IS PROPRIETARY AND" at 53.546,-72.833 h0.76
  text "RESTRICTED. ANY REPRODUCTION IN PART OR WHOLE WITHOUT THE" at 54.458,-74.333 h0.76
  text "EXPRESS WRITTEN PERMISSION OF THE OWNER IS PROHIBITED" at 55.174,-75.833 h0.76
DXF_JULY25_TOP:
  drawing of 300 lines, arcs and shapes, not listed
  text "LEAD PROTRUSION NOT TO EXCEED 0.03" at -43.06,199.16 h2.12
  text "5" at -39.56,162.56 h1.52
  text "7" at -34.76,162.56 h1.52
  text "9" at -30.16,162.56 h1.52
  text "11" at -25.46,162.56 h1.52
  text "13" at -21.26,162.56 h1.52
  text "15" at -16.66,162.56 h1.52
  text "17" at -11.76,162.56 h1.52
  text "19" at -7.26,162.56 h1.52
  text "21" at -2.36,162.56 h1.52
  text "23" at 2.04,162.56 h1.52
  text "25" at 6.64,162.56 h1.52
  text "27" at 11.54,162.56 h1.52
  text "1" at -43.26,150.06 h1.52
  text "31" at 15.64,150.06 h1.52
  text "3" at -43.16,145.46 h1.52
  text "29" at 15.54,145.26 h1.52
  text "2" at -43.26,140.66 h1.52
  text "32" at 15.24,140.46 h1.52
  text "4" at -43.46,135.86 h1.52
  text "30" at 15.44,135.76 h1.52
  text "28" at 15.44,131.16 h1.52
  text "6" at -43.16,131.06 h1.52
  text "8" at -43.36,126.66 h1.52
  text "26" at 15.44,126.56 h1.52
  text "24" at 15.24,121.96 h1.52
  text "10" at -43.86,121.86 h1.52
  text "12" at -43.76,117.06 h1.52
  text "22" at 15.54,117.06 h1.52
  text "20" at 15.54,112.56 h1.52
  text "14" at -43.86,112.46 h1.52
  text "16" at -43.36,99.26 h1.52
  text "18" at 14.74,99.26 h1.52
  text "PRIMARY" at -17.763,91.441 h2.12
  text "SECONDARY" at 52.326,91.441 h2.12
  text "12" at 15.34,55.96 h1.52
  text "6" at 2.003,55.923 h1.52
  text "8" at 6.803,55.923 h1.52
  text "10" at 11.403,55.923 h1.52
  text "14" at 20.303,55.923 h1.52
  text "16" at 24.903,55.923 h1.52
  text "18" at 29.803,55.923 h1.52
  text "20" at 34.303,55.923 h1.52
  text "22" at 39.203,55.923 h1.52
  text "24" at 43.603,55.923 h1.52
  text "26" at 48.203,55.923 h1.52
  text "28" at 53.103,55.923 h1.52
  text "2" at -1.697,43.423 h1.52
  text "32" at 57.203,43.423 h1.52
  text "4" at -1.597,38.823 h1.52
  text "30" at 57.103,38.623 h1.52
  text "1" at -1.697,34.023 h1.52
  text "31" at 57.203,33.96 h1.52
  text "3" at -1.897,29.223 h1.52
  text "29" at 57.003,29.123 h1.52
  text "27" at 57.003,24.523 h1.52
  text "5" at -1.597,24.423 h1.52
  text "7" at -1.797,20.023 h1.52
  text "25" at 57.003,19.923 h1.52
  text "23" at 56.803,15.323 h1.52
  text "9" at -2.297,15.223 h1.52
  text "11" at -2.197,10.423 h1.52
  text "21" at 57.103,10.423 h1.52
  text "19" at 57.103,5.923 h1.52
  text "13" at -2.297,5.823 h1.52
  text "15" at -1.797,-7.377 h1.52
  text "17" at 56.303,-7.377 h1.52
Drill Drawing:
  lines w0.254: -65.001,180.336 -63.307,180.336 -63.307,182.03 -65.001,182.03 -65.001,180.336
  lines w0.381: -66.519,179.193 144.649,179.193 ; -66.519,186.813 144.649,186.813 ; -52.527,175.383 -52.527,190.623 ; -34.803,175.383 -34.803,190.623 ; -0.624,175.383 -0.624,190.623 ; 21.366,175.383 21.366,190.623 ; 34.215,175.383 34.215,190.623 ; 52.854,175.383 52.854,190.623 ; 90.942,175.383 90.942,190.623 ; 105.925,175.383 105.925,190.623 ; 124.868,175.383 124.868,190.623 ; -66.519,175.383 144.649,175.383 144.649,190.623 -66.519,190.623 -66.519,175.383
  text "Symbol" at -64.233,187.956 h1.83
  text "Hit Count" at -51.384,187.956 h1.83
  text "Finished Hole Size" at -33.66,187.956 h1.83
  text "Hole Length" at 0.519,187.956 h1.83
  text "Plated" at 22.509,187.956 h1.83
  text "Hole Type" at 35.358,187.956 h1.83
  text "Drill Layer Pair" at 53.997,187.956 h1.83
  text "Via/Pad" at 92.085,187.956 h1.83
  text "Pad Shape" at 107.068,187.956 h1.83
  text "Tolerance" at 126.011,187.956 h1.83
  text "282" at -51.384,184.146 h1.52
  text "0.250mm (9.84mil)" at -33.66,184.146 h1.52
  text "-" at 0.519,184.146 h1.52
  text "PTH" at 22.509,184.146 h1.52
  text "Round" at 35.358,184.146 h1.52
  text "Top Layer - Bottom Layer" at 53.997,184.146 h1.52
  text "Via" at 92.085,184.146 h1.52
  text "Rounded" at 107.068,184.146 h1.52
  text "E" at -64.972,183.893 h1.69
  text "4" at -51.384,180.336 h1.52
  text "2.150mm (84.65mil)" at -33.66,180.336 h1.52
  text "-" at 0.519,180.336 h1.52
  text "PTH" at 22.509,180.336 h1.52
  text "Round" at 35.358,180.336 h1.52
  text "Top Layer - Bottom Layer" at 53.997,180.336 h1.52
  text "Pad" at 92.085,180.336 h1.52
  text "Rounded" at 107.068,180.336 h1.52
  text "286 Total" at -51.384,176.526 h1.52
  text ".Layer_Name" at -2.078,-74.18 h3.5
DESIGNATOR_BOT:
  drawing of 758 lines, arcs and shapes, not listed
Mechanical 28:
  lines w0.013: 10.889,48.36 46.189,48.36 ; 12.404,38.36 14.499,38.36 17.039,38.36 ; 12.889,25.36 44.189,25.36 ; 17.039,33.725 17.039,35.82 17.039,38.36 ; 17.039,42.995 17.039,40.9 17.039,38.36 ; 21.674,38.36 19.579,38.36 17.039,38.36 ; 28.539,17.32 28.539,33.4 ; 28.539,40.32 28.539,56.4 ; 116.019,119.577 118.114,119.577 120.654,119.577 ; 120.654,114.942 120.654,117.037 120.654,119.577 ; 120.654,124.212 120.654,122.117 120.654,119.577 ; 125.289,119.577 123.194,119.577 120.654,119.577 ; 17.239,46.67 39.839,46.67 39.839,50.05 17.239,50.05 17.239,46.67 ; 19.239,23.67 37.839,23.67 37.839,27.05 19.239,27.05 19.239,23.67
  text "1:1 SCALE" at 25.036,372.103 h6.35

## Dimensions
-3.5,59 to 60.5,59 on FAB_DWG
-3.5,59 to -3.5,-9 on FAB_DWG

## Text inside footprints (layer, text, board x,y; h text height)
J5: 3D_TOP "1" at 18.888,45.701 h1.02 r180; 3D_TOP "2" at 18.915,52.035 h1.02 r180; 3D_TOP "100" at 39.481,52.089 h1.02 r180; 3D_TOP "99" at 39.173,45.72 h1.02 r180; Top Overlay "99" at 40.365,46.71 h0.7; Top Overlay "100" at 40.39,49.099 h0.7; Top Overlay "2" at 16.34,49.21 h0.7; Top Overlay "1" at 16.64,46.81 h0.7
M1: Mechanical 18 "1" at -1.771,0.011 h0.64
M2: Mechanical 18 "1" at -1.771,51.01 h0.64
M3: Mechanical 18 "1" at 55.229,51.01 h0.64
M4: Mechanical 18 "1" at 55.229,0.011 h0.64